# Altium PCB DUAL_RPS_01.PcbDoc
Units mm, origin at the board's own origin, x right, y up, seen from the top; angles counter-clockwise.
Board outline 116.84 x 48.26 mm, 2 copper layers (Top Layer, Bottom Layer); 21 components, 7 nets, 50 pads, 0 vias.
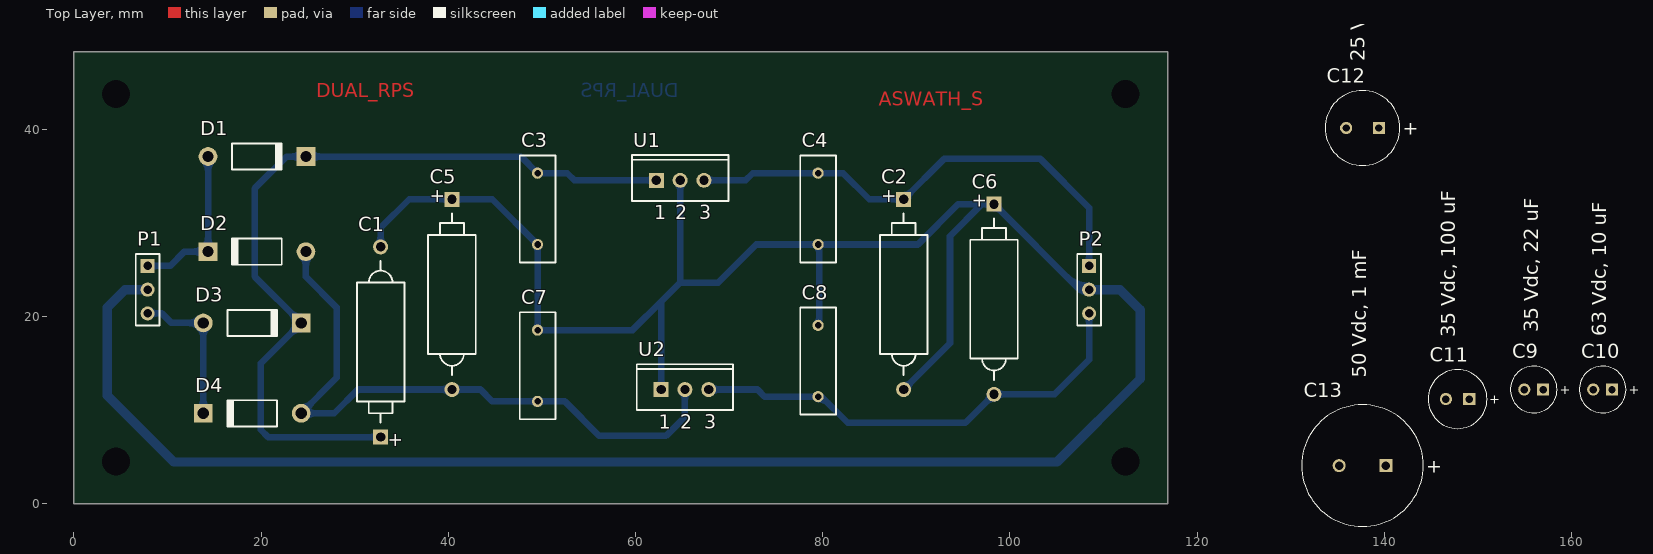
[diagram p0: Top Layer view]
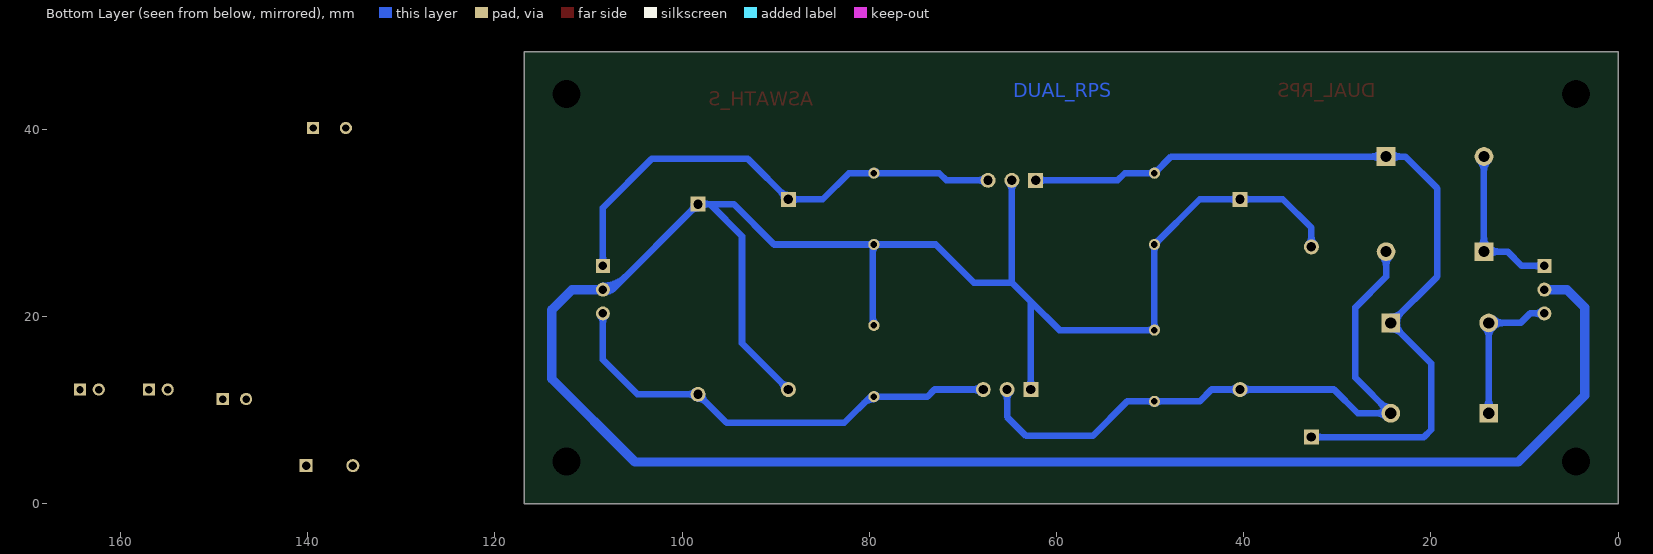
[diagram p1: Bottom Layer view, seen from below]

## Layer stack, top to bottom
Top Layer: signal copper 0.0356
Dielectric: dielectric 0.32, FR-4, Dk 4.8
Bottom Layer: signal copper 0.0356

## Board outline
0,0 116.84,0 116.84,48.26 0,48.26

## Design rules (kind name [scope] priority, off if disabled: settings)
Clearance [All] p1: gap=0.4
PolygonConnect [All] p1: connectstyle=Relief reliefconductorwidth=0.254 reliefentries=4 polygonreliefangle="90 Angle"
RoutingVias [All] p1: holewidth=0.711 width=1.27 viastyle="Through Hole" minholewidth=0.711 minwidth=1.27 maxholewidth=0.711 maxwidth=1.27
SilkscreenOverComponentPads [All] p1: minsilkscreentomaskgap=0.254
SolderMaskExpansion [All] p1: expansion=0.102
Width [All] p1: maxlimit=1.2 minlimit=0.4 preferedwidth=0.7
27 further rules are at their usual default settings.

## Components (designator, comment, footprint, x,y, rotation, side; value= is the part's Value field where it differs from the comment)
C1 "50 Vdc" POLAR0.8 32.766,17.272 r270 top
C2 "50 Vdc" POLAR0.8 88.646,22.352 r90 top
C3 "Capacitor Disc" RAD-0.3 49.53,31.496 r90 top
C4 "Capacitor Disc" RAD-0.3 79.502,31.496 r90 top
C5 "50 Vdc" POLAR0.8 40.386,22.352 r90 top
C6 "50 Vdc" POLAR0.8 98.298,21.844 r90 top
C7 "Capacitor Disc" RAD-0.3 49.53,14.732 r90 top
C8 "Capacitor Disc" RAD-0.3 79.502,15.24 r90 top
C9 "35 Vdc, 22 uF" WCAP-ATG8_5x11x2 155.956,12.192 r0 top
C10 "63 Vdc, 10 uF" WCAP-ATG8_5x11x2 163.322,12.192 r0 top
C11 "35 Vdc, 100 uF" WCAP-ATG8_6.3x11x2.5 147.828,11.176 r0 top
C12 "25 Vdc, 470 uF" WCAP-ATG8_8x11.5x3.5 137.668,40.132 r0 top
C13 "50 Vdc, 1 mF" WCAP-ATG8_13x25x5 137.668,4.064 r0 top
D1 "Diode 1N4007" DIO10.46-5.3x2.8 19.558,37.084 r0 top
D2 "Diode 1N4007" DIO10.46-5.3x2.8 19.558,26.924 r180 top
D3 "Diode 1N4007" DIO10.46-5.3x2.8 19.05,19.304 r0 top
D4 "Diode 1N4007" DIO10.46-5.3x2.8 19.05,9.652 r180 top
P1 "Header 3" HDR1X3 7.874,25.4 r270 top
P2 "Header 3" HDR1X3 108.458,25.4 r270 top
U1 "MC7812CT" 221A-04 64.77,34.544 r0 top
U2 "MC7912ACT" 221A-04 65.278,12.192 r0 top

## Footprints (in the part's own frame and the unit in brackets; to place one, negate y for a bottom-side part, rotate by r counter-clockwise, add the part's x,y. Pads: shape width x height; smd on the part's side, far side on the other; paste and mask are expansions set on the pad)
221A-04 [mm] "TO, Thru-Hole, Vertical, Heatsink Mounted; 3 In-Line Leads; Pitch 2.54 mm"
  rect 1.6x1.6 hole 1: 1(-2.54,0)
  round 1.6 hole 1: 2(0,0) 3(2.54,0)
  silkscreen extent -5.15,-2.2 5.15,2.7
DIO10.46-5.3x2.8 [mm] "Diode, Axial; Body 5.2 x 2.7 mm (LxDia. max), Lead Dia. 0.86 mm (max)"
  round 2 hole 1.2: 1(-5.23,0)
  rect 2x2 hole 1.2: 2(5.23,0)
  silkscreen extent -2.65,-1.4 2.75,1.4
HDR1X3 [mm] "Connector; Header; 3 Position"
  rect 1.5x1.5 hole 0.9: 1(0,0)
  round 1.5 hole 0.9: 2(2.54,0) 3(5.08,0)
  silkscreen extent -1.27,-1.27 6.35,1.27
POLAR0.8 [mm] "Polarized Capacitor (Axial); 2 Leads"
  rect 1.6x1.6 hole 1: 1(10.16,0)
  round 1.6 hole 1: 2(-10.16,0)
  silkscreen extent -8.64,-2.54 8.64,2.54
RAD-0.3 [mm] "Radial Cap, Thru-Hole; 2 Leads; 0.3 in Pin Spacing"
  round 1.2 hole 0.7: 1(-3.81,0) 2(3.81,0)
  silkscreen extent -5.71,-1.91 5.71,1.91
WCAP-ATG8_5x11x2 [mm] "Aluminum Electrolytic Capacitors, 5x11mm"
  rect 1.3x1.3 hole 0.8: 1(1,0)
  round 1.3 hole 0.8: 2(-1,0)
  silkscreen extent -2.5,-2.5 2.5,2.5, body extent -2.49,-2.5 2.5,2.5, height 11.31
WCAP-ATG8_6.3x11x2.5 [mm] "Aluminum Electrolytic Capacitors, 6.3x11mm"
  rect 1.3x1.3 hole 0.8: 1(1.25,0)
  round 1.3 hole 0.8: 2(-1.25,0)
  silkscreen extent -3.15,-3.15 3.15,3.15, body extent -3.14,-3.15 3.15,3.15, height 11.31
WCAP-ATG8_8x11.5x3.5 [mm] "Aluminum Electrolytic Capacitors, 8x11.5mm"
  rect 1.3x1.3 hole 0.8: 1(1.75,0)
  round 1.3 hole 0.8: 2(-1.75,0)
  silkscreen extent -4,-4 4,4, body extent -3.99,-4 4,4, height 11.81
WCAP-ATG8_13x25x5 [mm] "Aluminum Electrolytic Capacitors, 13x25mm"
  rect 1.4x1.4 hole 0.9: 1(2.5,0)
  round 1.4 hole 0.9: 2(-2.5,0)
  silkscreen extent -6.5,-6.5 6.5,6.5, body extent -6.49,-6.5 6.5,6.5, height 25.31

## Part data
C1 C2 C5 C6: library part "Cap Pol2", "Polarized Capacitor (Axial)"
C3 C4 C7 C8: library part Cap, "Capacitor"
C9: library part 860010572003, "WCAP-ATG8 Aluminum Electrolytic Capacitors, 5x11mm, 35 Vdc, 22 uF"
C10: library part 860010772009, "WCAP-ATG8 Aluminum Electrolytic Capacitors, 5x11mm, 63 Vdc, 10 uF"
C11: library part 860010573007, "WCAP-ATG8 Aluminum Electrolytic Capacitors, 6.3x11mm, 35 Vdc, 100 uF"
C12: library part 860010474013, "WCAP-ATG8 Aluminum Electrolytic Capacitors, 8x11.5mm, 25 Vdc, 470 uF"
C13: library part 860010678024, "WCAP-ATG8 Aluminum Electrolytic Capacitors, 13x25mm, 50 Vdc, 1 mF"
D1 D2 D3 D4: "1 Amp General Purpose Rectifier"
P1 P2: "Header, 3-Pin"
U1: "3-Terminal Positive Fixed Voltage Regulator"
U2: "Three-Terminal Negative Fixed Voltage Regulator"

## Free pads (board coordinates)
  round 1.524 hole 3: 3(4.5,4.5) 3(4.5,43.76) 3(112.34,4.5) 3(112.34,43.76)

## Nets (pads, with @x,y where several pads share a name; then routed paths per layer and width w, separated by ;. In a path a pad name is that pad's centre, name@x,y a point inside that pad or via, vN(x,y) a via of type N, cw(c..) or ccw(c..) an arc to the next point about the centre after c; other vN are vias at no path point)
+12V: C2.1 C4.2 P2.1 U1.3 | length 69.9
  Bottom Layer w0.7: U1.3 71.755,34.544 72.517,35.306 C4.2 82.169,35.306 84.963,32.512 C2.1 92.964,36.83 103.251,36.83 108.458,31.623 P2.1 ; 68.396,34.544 ccw(c68.396,33.458) 67.628,34.226 cw(c68.396,33.458) 68.396,34.544 ; 68.396,34.544 cw(c68.396,35.63) 67.628,34.862 ccw(c68.396,35.63) 68.396,34.544 ; 78.898,35.306 cw(c78.898,34.702) 79.325,35.129 ccw(c78.898,34.702) 78.898,35.306 ; 78.898,35.306 ccw(c78.898,35.91) 79.325,35.483 cw(c78.898,35.91) 78.898,35.306 ; 80.106,35.306 ccw(c80.106,34.702) 79.679,35.129 cw(c80.106,34.702) 80.106,35.306 ; 80.106,35.306 cw(c80.106,35.91) 79.679,35.483 ccw(c80.106,35.91) 80.106,35.306 ; 87.56,32.512 cw(c87.56,31.426) 88.328,32.194 ccw(c87.56,31.426) 87.56,32.512 ; 87.56,32.512 ccw(c87.56,33.598) 88.328,32.83 cw(c87.56,33.598) 87.56,32.512 ; C2.1@89.414,33.28 cw(c88.646,34.048) 88.646,32.962 ccw(c88.646,34.048) C2.1@89.414,33.28 ; C2.1@89.414,33.28 ccw(c90.182,32.512) 89.096,32.512 cw(c90.182,32.512) C2.1@89.414,33.28 ; 108.458,26.366 ccw(c109.424,26.366) 108.741,25.683 cw(c109.424,26.366) 108.458,26.366 ; 108.458,26.366 cw(c107.492,26.366) 108.175,25.683 ccw(c107.492,26.366) 108.458,26.366
GND: C1.2 C2.2 C3.1 C4.1 C5.1 C6.1 C7.2 C8.2 P1.2 P2.2 U1.2 U2.1 | length 350.1
  Bottom Layer w0.7: C1.2 32.766,29.464 35.814,32.512 C5.1 44.704,32.512 C3.1 C7.2 59.69,18.542 62.738,21.59 ; U2.1 62.738,21.59 ; U1.2 64.77,23.622 ; C8.2 79.629,19.177 C4.1@79.629,27.686 ; C2.2 93.599,17.145 93.599,28.575 97.028,32.004 ; P2.2 107.442,22.86 C6.1 97.028,32.004 ; 32.766,28.518 ccw(c33.852,28.518) 33.084,27.75 cw(c33.852,28.518) 32.766,28.518 ; 32.766,28.518 cw(c31.68,28.518) 32.448,27.75 ccw(c31.68,28.518) 32.766,28.518 ; 39.3,32.512 cw(c39.3,31.426) 40.068,32.194 ccw(c39.3,31.426) 39.3,32.512 ; 39.3,32.512 ccw(c39.3,33.598) 40.068,32.83 cw(c39.3,33.598) 39.3,32.512 ; 41.472,32.512 cw(c41.472,33.598) 40.704,32.83 ccw(c41.472,33.598) 41.472,32.512 ; 41.472,32.512 ccw(c41.472,31.426) 40.704,32.194 cw(c41.472,31.426) 41.472,32.512 ; 49.103,28.113 cw(c48.676,27.686) 49.28,27.686 ccw(c48.676,27.686) 49.103,28.113 ; 49.103,28.113 ccw(c49.53,28.54) 49.53,27.936 cw(c49.53,28.54) 49.103,28.113 ; 49.53,19.146 ccw(c50.134,19.146) C7.2@49.707,18.719 ; 49.53,19.146 ccw(c50.134,19.146) C7.2@49.707,18.719 ; 49.53,19.146 cw(c48.926,19.146) 49.353,18.719 ccw(c48.926,19.146) 49.53,19.146 ; 49.53,27.082 cw(c50.134,27.082) 49.707,27.509 ccw(c50.134,27.082) 49.53,27.082 ; 49.53,27.082 ccw(c48.926,27.082) 49.353,27.509 cw(c48.926,27.082) 49.53,27.082 ; C7.2@49.707,18.719 ccw(c50.134,19.146) 50.134,18.542 ; C7.2@49.707,18.719 ccw(c50.134,19.146) 50.134,18.542 ; 50.134,18.542 ccw(c50.134,17.938) 49.707,18.365 cw(c50.134,17.938) 50.134,18.542 ; 62.738,13.278 cw(c61.652,13.278) 62.42,12.51 ccw(c61.652,13.278) 62.738,13.278 ; 62.738,13.278 ccw(c63.824,13.278) 63.056,12.51 cw(c63.824,13.278) 62.738,13.278 ; 62.738,21.59 64.77,23.622 ; 64.77,23.622 68.834,23.622 72.898,27.686 C4.1 C4.1@79.629,27.686 ; 64.77,33.458 ccw(c63.684,33.458) 64.452,34.226 cw(c63.684,33.458) 64.77,33.458 ; 64.77,33.458 cw(c65.856,33.458) 65.088,34.226 ccw(c65.856,33.458) 64.77,33.458 ; 78.898,27.686 cw(c78.898,27.082) C4.1@79.325,27.509 ; 78.898,27.686 cw(c78.898,27.082) C4.1@79.325,27.509 ; 78.898,27.686 ccw(c78.898,28.29) 79.325,27.863 cw(c78.898,28.29) 78.898,27.686 ; C4.1@79.325,27.509 cw(c78.592,26.776) 79.629,26.776 ccw(c78.592,26.776) C4.1@79.325,27.509 ; C4.1@79.629,27.686 90.17,27.686 94.488,32.004 97.028,32.004 ; 80.106,27.686 ccw(c80.106,27.082) 79.679,27.509 cw(c80.106,27.082) 80.106,27.686 ; 80.106,27.686 cw(c80.106,28.29) 79.679,27.863 ccw(c80.106,28.29) 80.106,27.686 ; 89.414,12.96 cw(c88.646,13.728) 88.646,12.642 ccw(c88.646,13.728) 89.414,12.96 ; 89.414,12.96 ccw(c90.182,12.192) 89.096,12.192 cw(c90.182,12.192) 89.414,12.96 ; 97.212,32.004 cw(c97.212,30.918) 97.98,31.686 ccw(c97.212,30.918) 97.212,32.004 ; 97.212,32.004 ccw(c97.212,33.09) 97.98,32.322 cw(c97.212,33.09) 97.212,32.004 ; C6.1@99.066,31.236 ccw(c98.298,30.468) 98.298,31.554 cw(c98.298,30.468) C6.1@99.066,31.236 ; C6.1@99.066,31.236 cw(c99.834,32.004) 98.748,32.004 ccw(c99.834,32.004) C6.1@99.066,31.236 ; 107.492,22.86 cw(c107.492,21.894) 108.175,22.577 ccw(c107.492,21.894) 107.492,22.86 ; 107.492,22.86 ccw(c107.492,23.826) 108.175,23.143 cw(c107.492,23.826) 107.492,22.86 ; C8.2@79.325,19.227 ccw(c78.592,19.96) 79.629,19.96 cw(c78.592,19.96) C8.2@79.325,19.227 ; 106.041,24.261 ccw(c108.458,26.679) 108.458,23.26 cw(c108.458,26.679) 106.041,24.261 ; 107.236,23.066 ccw(c108.458,24.289) 108.458,22.56 cw(c108.458,24.289) 107.236,23.066
  Bottom Layer w1: P1.2 5.461,22.86 3.556,20.955 3.556,11.557 10.668,4.445 105.029,4.445 113.919,13.335 113.919,20.701 111.76,22.86 P2.2
NetC1_1: C1.1 C3.2 D1.2 D3.2 U1.1 | length 118.5
  Bottom Layer w0.7: C1.1 20.747,7.112 19.962,7.897 19.962,14.986 D3.2 19.304,24.28 19.304,33.655 22.733,37.084 D1.2 47.752,37.084 C3.2 52.705,35.306 53.467,34.544 U1.1 ; 23.17,18.194 ccw(c22.061,19.304) D3.2@23.63,19.304 ; 23.17,18.194 ccw(c22.061,19.304) D3.2@23.63,19.304 ; 23.17,18.194 cw(c24.28,17.085) 24.28,18.654 ccw(c24.28,17.085) 23.17,18.194 ; 23.17,20.414 cw(c22.061,19.304) D3.2@23.63,19.304 ; 23.17,20.414 cw(c22.061,19.304) D3.2@23.63,19.304 ; 23.17,20.414 ccw(c24.28,21.523) 24.28,19.954 cw(c24.28,21.523) 23.17,20.414 ; 23.219,37.084 cw(c23.219,35.515) 24.328,36.624 ccw(c23.219,35.515) 23.219,37.084 ; 23.219,37.084 ccw(c23.219,38.653) 24.328,37.544 cw(c23.219,38.653) 23.219,37.084 ; 26.357,37.084 ccw(c26.357,35.515) 25.248,36.624 cw(c26.357,35.515) 26.357,37.084 ; 26.357,37.084 cw(c26.357,38.653) 25.248,37.544 ccw(c26.357,38.653) 26.357,37.084 ; 31.68,7.112 ccw(c31.68,8.198) 32.448,7.43 cw(c31.68,8.198) 31.68,7.112 ; 31.68,7.112 cw(c31.68,6.026) 32.448,6.794 ccw(c31.68,6.026) 31.68,7.112 ; 49.103,35.733 ccw(c49.53,36.16) 49.53,35.556 cw(c49.53,36.16) 49.103,35.733 ; 49.103,35.733 cw(c48.676,35.306) 49.28,35.306 ccw(c48.676,35.306) 49.103,35.733 ; 50.134,35.306 ccw(c50.134,34.702) 49.707,35.129 cw(c50.134,34.702) 50.134,35.306 ; 50.134,35.306 cw(c50.134,35.91) 49.707,35.483 ccw(c50.134,35.91) 50.134,35.306 ; 61.144,34.544 cw(c61.144,33.458) 61.912,34.226 ccw(c61.144,33.458) 61.144,34.544 ; 61.144,34.544 ccw(c61.144,35.63) 61.912,34.862 cw(c61.144,35.63) 61.144,34.544
NetC5_2: C5.2 C7.1 D2.1 D4.1 U2.2 | length 96.9
  Bottom Layer w0.7: D2.1 24.788,24.234 28.067,20.955 28.067,13.439 D4.1 27.813,9.652 30.353,12.192 C5.2 43.434,12.192 44.704,10.922 C7.1 52.451,10.922 56.134,7.239 63.246,7.239 65.278,9.271 U2.2 ; 24.788,25.355 ccw(c23.219,25.355) 24.328,26.464 cw(c23.219,25.355) 24.788,25.355 ; 24.788,25.355 cw(c26.357,25.355) 25.248,26.464 ccw(c26.357,25.355) 24.788,25.355 ; 25.39,10.762 cw(c24.28,11.871) 24.28,10.302 ccw(c24.28,11.871) 25.39,10.762 ; 25.39,10.762 ccw(c26.499,9.652) 24.93,9.652 cw(c26.499,9.652) 25.39,10.762 ; 25.849,9.652 ccw(c25.849,8.083) 24.74,9.192 cw(c25.849,8.083) 25.849,9.652 ; 25.849,9.652 cw(c25.849,11.221) 24.74,10.112 ccw(c25.849,11.221) 25.849,9.652 ; 39.3,12.192 cw(c39.3,11.106) 40.068,11.874 ccw(c39.3,11.106) 39.3,12.192 ; 39.3,12.192 ccw(c39.3,13.278) 40.068,12.51 cw(c39.3,13.278) 39.3,12.192 ; 41.472,12.192 ccw(c41.472,11.106) 40.704,11.874 cw(c41.472,11.106) 41.472,12.192 ; 41.472,12.192 cw(c41.472,13.278) 40.704,12.51 ccw(c41.472,13.278) 41.472,12.192 ; 48.926,10.922 cw(c48.926,10.318) 49.353,10.745 ccw(c48.926,10.318) 48.926,10.922 ; 48.926,10.922 ccw(c48.926,11.526) 49.353,11.099 cw(c48.926,11.526) 48.926,10.922 ; 50.134,10.922 ccw(c50.134,10.318) 49.707,10.745 cw(c50.134,10.318) 50.134,10.922 ; 50.134,10.922 cw(c50.134,11.526) 49.707,11.099 ccw(c50.134,11.526) 50.134,10.922 ; 65.278,11.106 ccw(c64.192,11.106) 64.96,11.874 cw(c64.192,11.106) 65.278,11.106 ; 65.278,11.106 cw(c66.364,11.106) 65.596,11.874 ccw(c66.364,11.106) 65.278,11.106
NetC6_2: C6.2 C8.1 P2.3 U2.3 | length 67.4
  Bottom Layer w0.7: U2.3 73.025,12.192 73.787,11.43 C8.1 79.883,11.43 82.677,8.636 95.25,8.636 C6.2 104.775,11.684 108.458,15.367 P2.3 ; 68.904,12.192 ccw(c68.904,11.106) 68.136,11.874 cw(c68.904,11.106) 68.904,12.192 ; 68.904,12.192 cw(c68.904,13.278) 68.136,12.51 ccw(c68.904,13.278) 68.904,12.192 ; 78.898,11.43 cw(c78.898,10.826) 79.325,11.253 ccw(c78.898,10.826) 78.898,11.43 ; 78.898,11.43 ccw(c78.898,12.034) 79.325,11.607 cw(c78.898,12.034) 78.898,11.43 ; 97.53,10.916 cw(c98.298,10.148) 98.298,11.234 ccw(c98.298,10.148) 97.53,10.916 ; 97.53,10.916 ccw(c96.762,11.684) 97.848,11.684 cw(c96.762,11.684) 97.53,10.916 ; 99.384,11.684 ccw(c99.384,10.598) 98.616,11.366 cw(c99.384,10.598) 99.384,11.684 ; 99.384,11.684 cw(c99.384,12.77) 98.616,12.002 ccw(c99.384,12.77) 99.384,11.684 ; 108.458,19.354 ccw(c107.492,19.354) 108.175,20.037 cw(c107.492,19.354) 108.458,19.354 ; 108.458,19.354 cw(c109.424,19.354) 108.741,20.037 ccw(c109.424,19.354) 108.458,19.354 ; C8.1@79.502,11.18 cw(c79.502,9.657) 80.579,10.734 ccw(c79.502,9.657) C8.1@79.502,11.18
NetD1_1: D1.1 D2.2 P1.1 | length 35.2
  Bottom Layer w0.7: P1.1 10.287,25.4 11.811,26.924 D2.2 D1.1 ; 8.84,25.4 ccw(c8.84,24.434) 8.157,25.117 cw(c8.84,24.434) 8.84,25.4 ; 8.84,25.4 cw(c8.84,26.366) 8.157,25.683 ccw(c8.84,26.366) 8.84,25.4 ; 12.759,26.924 cw(c12.759,25.355) 13.868,26.464 ccw(c12.759,25.355) 12.759,26.924 ; 12.759,26.924 ccw(c12.759,28.493) D2.2@13.868,27.384 ; 12.759,26.924 ccw(c12.759,28.493) D2.2@13.868,27.384 ; D2.2@13.868,27.384 ccw(c12.759,28.493) 14.328,28.493 ; D2.2@13.868,27.384 ccw(c12.759,28.493) 14.328,28.493 ; 14.328,28.493 ccw(c15.897,28.493) 14.788,27.384 cw(c15.897,28.493) 14.328,28.493 ; 14.328,35.515 ccw(c12.759,35.515) 13.868,36.624 cw(c12.759,35.515) 14.328,35.515 ; 14.328,35.515 cw(c15.897,35.515) 14.788,36.624 ccw(c15.897,35.515) 14.328,35.515
  Bottom Layer w1: P1.1@7.747,25.273 P1.1
NetD3_1: D3.1 D4.2 P1.3 | length 33.8
  Bottom Layer w0.7: P1.3 9.398,20.32 10.414,19.304 D3.1 D4.2 ; 8.84,20.32 ccw(c8.84,19.354) 8.157,20.037 cw(c8.84,19.354) 8.84,20.32 ; 8.84,20.32 cw(c8.84,21.286) 8.157,20.603 ccw(c8.84,21.286) 8.84,20.32 ; 12.251,19.304 cw(c12.251,17.735) D3.1@13.36,18.844 ; 12.251,19.304 ccw(c12.251,20.873) 13.36,19.764 cw(c12.251,20.873) 12.251,19.304 ; 12.251,19.304 cw(c12.251,17.735) D3.1@13.36,18.844 ; D3.1@13.36,18.844 cw(c12.251,17.735) 13.82,17.735 ; D3.1@13.36,18.844 cw(c12.251,17.735) 13.82,17.735 ; 13.82,11.221 cw(c12.251,11.221) 13.36,10.112 ccw(c12.251,11.221) 13.82,11.221 ; 13.82,11.221 ccw(c15.389,11.221) 14.28,10.112 cw(c15.389,11.221) 13.82,11.221 ; 13.82,17.735 cw(c15.389,17.735) 14.28,18.844 ccw(c15.389,17.735) 13.82,17.735
pads on no net: C9.1 C9.2 C10.1 C10.2 C11.1 C11.2 C12.1 C12.2 C13.1 C13.2

## Other copper
Top Layer:
  text "DUAL_RPS" at 25.908,42.926 h2.52
  text "ASWATH_S" at 85.979,42.037 h2.52
Bottom Layer:
  text "DUAL_RPS" at 64.643,42.926 h2.52

## Silkscreen, mask and mechanical layers (free items; w line width, h text height)
Mechanical 1:
  the board outline again, w0.254

## Text inside footprints (layer, text, board x,y; h text height)
C1: Top Overlay "+" at 33.716,7.62 h1.5 r270
C2: Top Overlay "+" at 87.696,32.004 h1.5 r90
C5: Top Overlay "+" at 39.436,32.004 h1.5 r90
C6: Top Overlay "+" at 97.348,31.496 h1.5 r90
C9: Top Overlay "+" at 158.756,11.692 h1
C10: Top Overlay "+" at 166.122,11.692 h1
C11: Top Overlay "+" at 151.228,10.676 h1
C12: Top Overlay "+" at 141.968,39.432 h1.5
C13: Top Overlay "+" at 144.468,3.314 h1.5
U1: Top Overlay "3" at 66.81,30.369 h1.5; Top Overlay "2" at 64.27,30.369 h1.5; Top Overlay "1" at 61.98,30.369 h1.5
U2: Top Overlay "3" at 67.318,8.017 h1.5; Top Overlay "2" at 64.778,8.017 h1.5; Top Overlay "1" at 62.488,8.017 h1.5